# Altium PCB ne555dimmer.PcbDoc
Units mm, origin at the board's own origin, x right, y up, seen from the top; angles counter-clockwise.
Board outline 58.29 x 33.66 mm, 2 copper layers (Top Layer, Bottom Layer); 11 components, 10 nets, 30 pads, 0 vias.
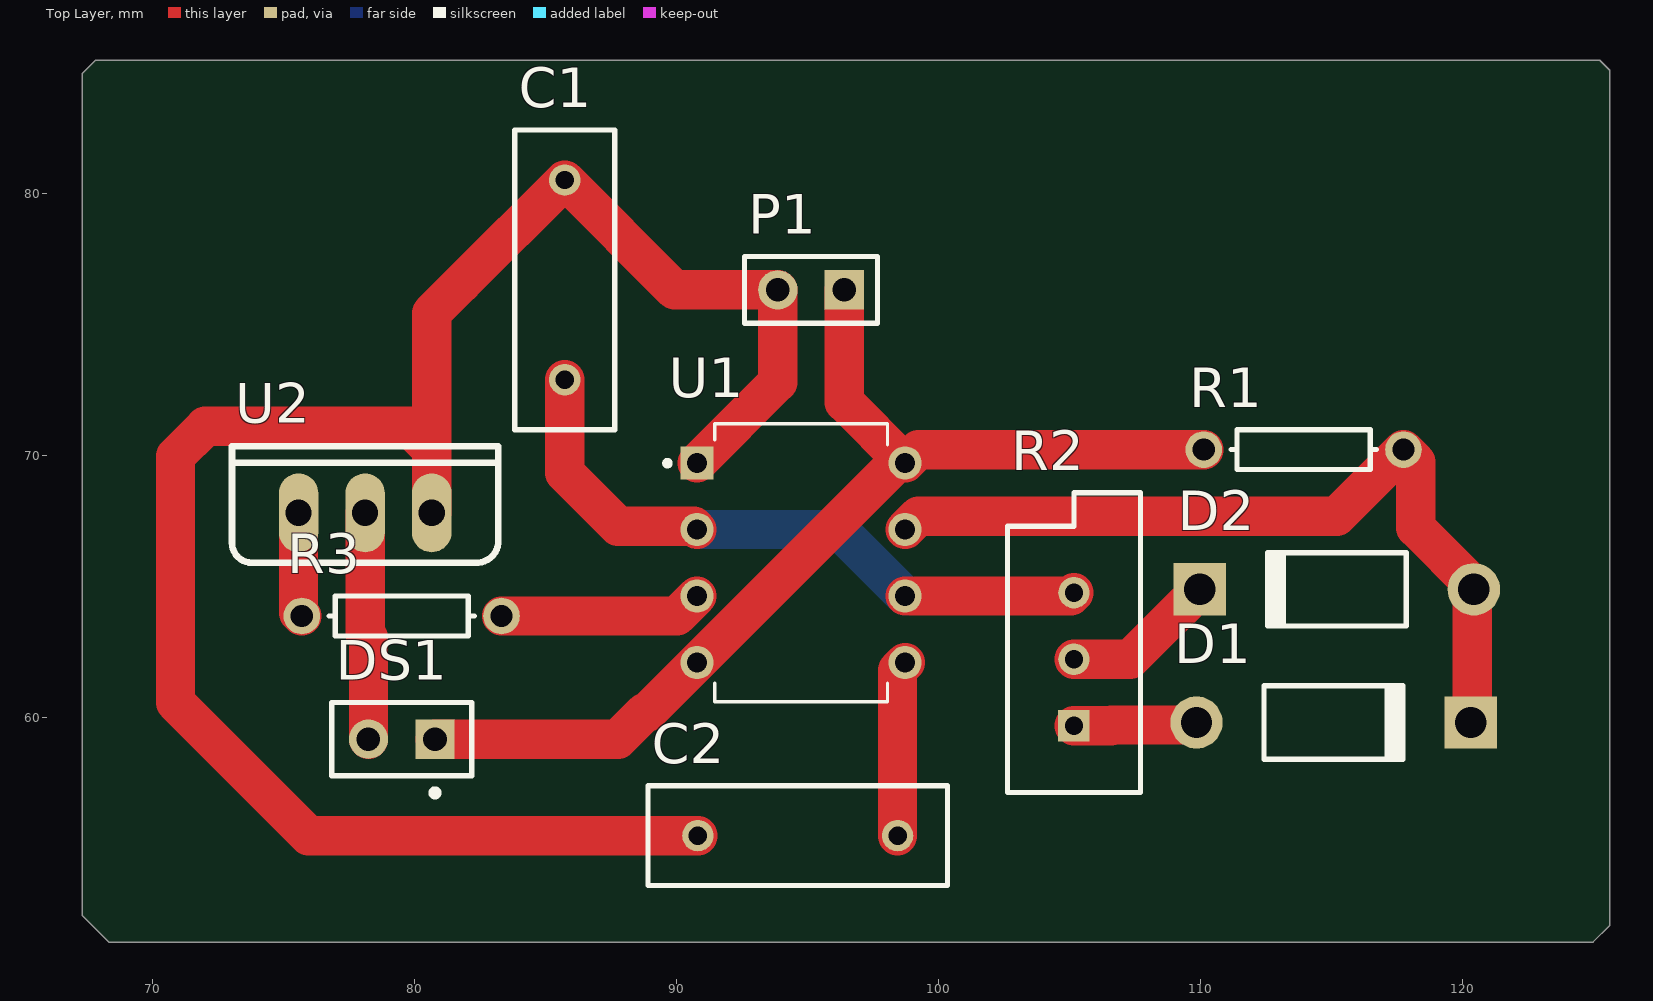
[diagram p0: Top Layer view]
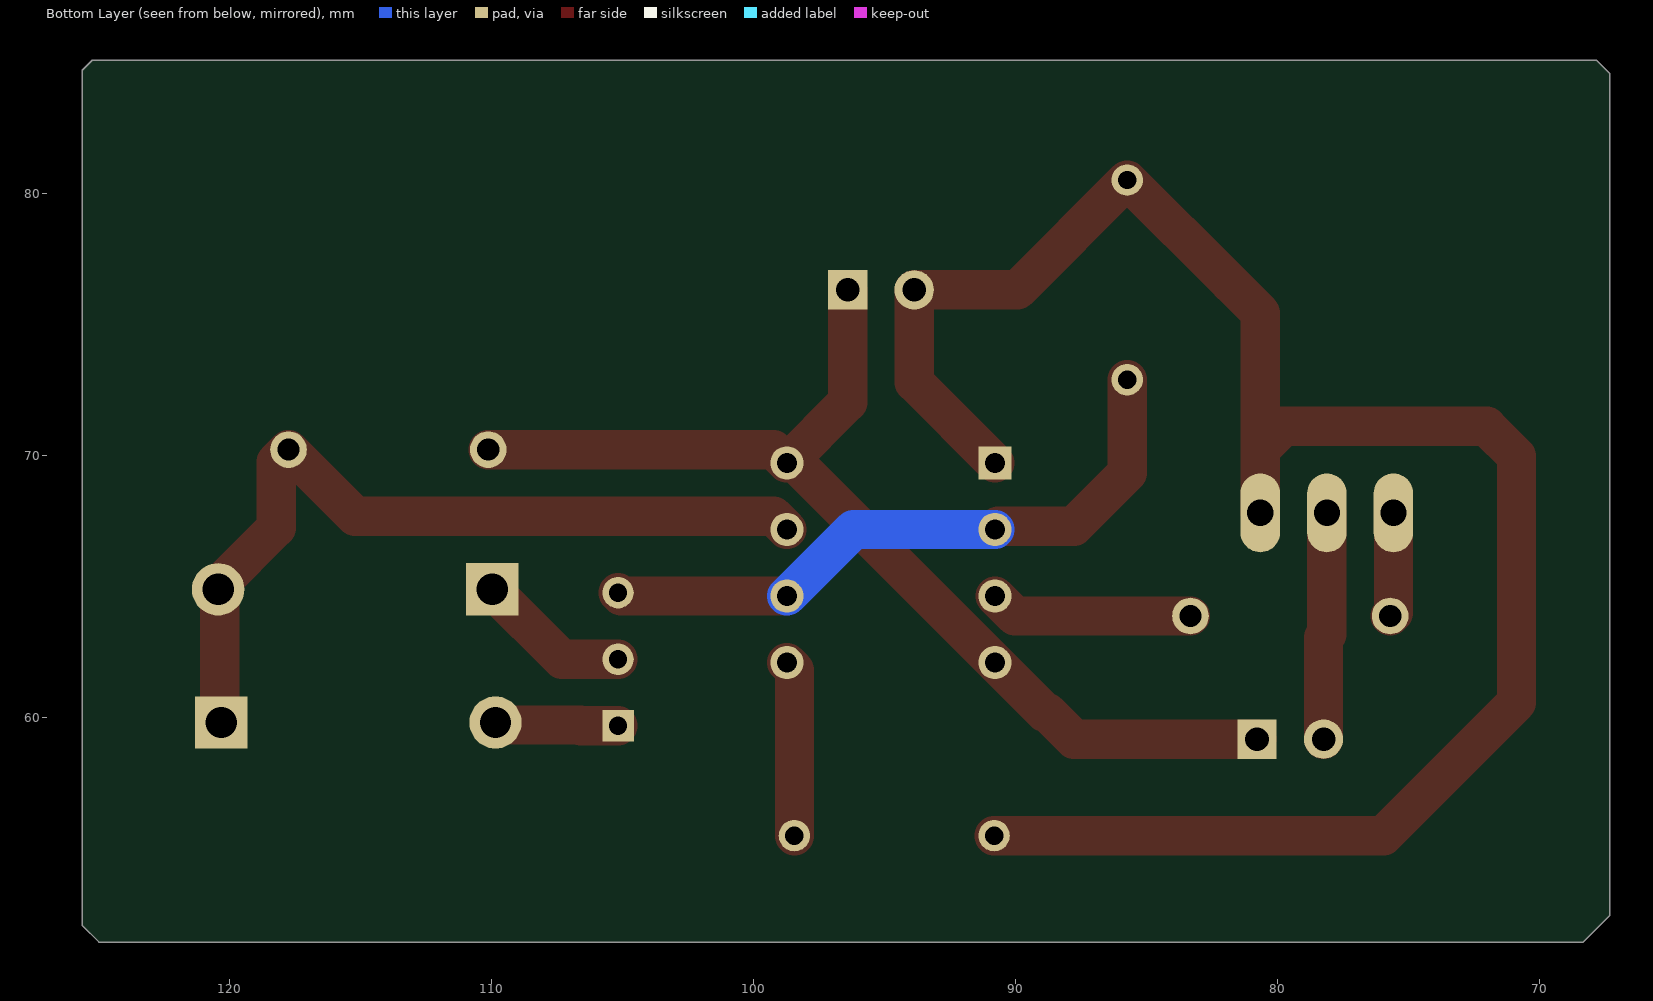
[diagram p1: Bottom Layer view, seen from below]

## Layer stack, top to bottom
Top Solder: solder mask 0.0102, Solder Resist, Dk 3.5
Top Layer: signal copper 0.0356
Dielectric 1: dielectric 0.32, FR-4, Dk 4.8
Bottom Layer: signal copper 0.0356
Bottom Solder: solder mask 0.0102, Solder Resist, Dk 3.5

## Board outline
67.31,52.451 68.326,51.435 124.968,51.435 125.603,52.07 125.603,84.709 125.222,85.09 67.818,85.09 67.31,84.582

## Design rules (kind name [scope] priority, off if disabled: settings)
Clearance [All] p1: gap=0.152 ignorepadtopadclearanceinfootprint=FALSE except(0: Arc-Hole Track-Hole SMDPad-Hole THPad-Hole Via-Hole Fill-Hole Poly-Hole Region-Hole Text-Hole)
PolygonConnect [All] p1: connectstyle=Relief reliefconductorwidth=0.254 reliefentries=4 polygonreliefangle="90 Angle" airgapwidth=0.254
RoutingVias [All] p1: holewidth=0.711 width=1.27 viastyle="Through Hole" minholewidth=0.711 minwidth=1.27 maxholewidth=0.711 maxwidth=1.27
SolderMaskExpansion [All] p1: expansion=0.102 istentingtop=FALSE
Width [All] p1: maxlimit=4 minlimit=0.254 preferedwidth=2 minimp=50.000000 maximp=50.000000 favimp=50.000000
30 further rules are at their usual default settings.

## Components (designator, comment, footprint, x,y, rotation, side; value= is the part's Value field where it differs from the comment)
C1 "Cap" RAD-0.3 85.725,76.708 r270 top value=100nF
C2 "Cap" RAD-0.3 94.615,55.499 r0 top value=10nF
D1 "Diode 1N4007" DO-41 115.062,59.817 r0 top
D2 "Diode 1N4007" DO-41 115.189,64.897 r180 top
DS1 "Lamp" PIN2 80.772,59.182 r180 top
P1 "Header 2" HDR1X2 96.393,76.327 r180 top
R1 "Res1" AXIAL-0.3 113.919,70.231 r0 top value=1K
R2 "RPot" VR5 105.156,62.23 r90 top value=50K
R3 "Res1" AXIAL-0.3 79.502,63.881 r180 top value=1K
U1 "ne555" ne555 94.742,65.913 r0 top
U2 "irf44z" ırfz44 76.962,67.437 r0 top

## Footprints (in the part's own frame and the unit in brackets; to place one, negate y for a bottom-side part, rotate by r counter-clockwise, add the part's x,y. Pads: shape width x height; smd on the part's side, far side on the other; paste and mask are expansions set on the pad)
AXIAL-0.3 [mm] "Axial Device, Thru-Hole; 2 Leads; 0.3 in Pin Spacing"
  round 1.4 hole 0.85: 1(-3.81,0) 2(3.81,0)
  silkscreen extent -2.77,-0.76 2.77,0.76
DO-41 [mm] "Diode, Axial; Body 5.2 x 2.7 mm (LxDia. max), Lead Dia. 0.86 mm (max)"
  round 2 hole 1.2: 1(-5.23,0)
  rect 2x2 hole 1.2: 2(5.23,0)
  silkscreen extent -2.65,-1.4 2.75,1.4
HDR1X2 [mm] "Connector; Header; 2 Position"
  rect 1.5x1.5 hole 0.9: 1(0,0)
  round 1.5 hole 0.9: 2(2.54,0)
  silkscreen extent -1.27,-1.27 3.81,1.27
ne555 [mm]
  rect 1.268x1.268 hole 0.76: 1(-3.97,3.81)
  round 1.268 hole 0.76: 2(-3.97,1.27) 3(-3.97,-1.27) 4(-3.97,-3.81) 5(3.97,-3.81) 6(3.97,-1.27) 7(3.97,1.27) 8(3.97,3.81)
  silkscreen extent -5.2,-5.3 3.3,5.3
PIN2 [mm] "Photosensitive Diode; 2 Leads"
  rect 1.5x1.5 hole 0.9: 1(0,0)
  round 1.5 hole 0.9: 2(2.54,0)
  silkscreen extent -1.4,-1.4 3.94,2.17
RAD-0.3 [mm] "Radial Cap, Thru-Hole; 2 Leads; 0.3 in Pin Spacing"
  round 1.2 hole 0.7: 1(-3.81,0) 2(3.81,0)
  silkscreen extent -5.71,-1.91 5.71,1.91
VR5 [mm] "Thru-Hole; 3 Leads"
  rect 1.2x1.2 hole 0.7: 1(-2.54,0)
  round 1.2 hole 0.7: 2(0,0) 3(2.54,0)
  silkscreen extent -5.08,-2.54 6.35,2.54
ırfz44 [mil]
  oval 59.37x118.74 hole 39.37: 1(-55,15) 2(45,15) 3(145,15)
  silkscreen extent -155,-60 245,115

## Part data
C1 C2: "Capacitor", LatestRevisionDate=17-Jul-2002, LatestRevisionNote="Re-released for DXP Platform.", PackageDescription="Radial Cap, Thru-Hole; 2 Leads; 0.3 in Pin Spacing", PackageReference=RAD-0.3, Published=8-Jun-2000, Publisher="Altium Limited"
D1 D2: "1 Amp General Purpose Rectifier", Code_JEDEC=DO-204-AL, ComponentLink1Description="Manufacturer Link", ComponentLink1URL=http://www.fairchildsemi.com/, ComponentLink2Description=Datasheet, ComponentLink2URL=http://www.fairchildsemi.com/ds/1N%2F1N4001.pdf, DatasheetVersion=1998, LatestRevisionDate=17-Jul-2002, LatestRevisionNote="Re-released for DXP Platform.", PackageDescription="Diode, Axial; Body 5.2 x 2.7 mm (LxDia. max), Lead Dia. 0.86 mm (max)", PackageReference=DO-41, PackageVersion=Aug-1999, Published=8-Jun-2000, Publisher="Altium Limited"
DS1: "Incandescent Bulb", LatestRevisionDate=17-Jul-2002, LatestRevisionNote="Re-released for DXP Platform.", PackageReference=PIN2, Published=24-Mar-1999, Publisher="Altium Limited"
P1: "Header, 2-Pin", LatestRevisionDate=17-Jul-2002, LatestRevisionNote="Re-released for DXP Platform.", Publisher="Altium Limited"
R1 R3: "Resistor", LatestRevisionDate=17-Jul-2002, LatestRevisionNote="Re-released for DXP Platform.", PackageDescription="Axial Device, Thru-Hole; 2 Leads; 0.3 in Pin Spacing", PackageReference=AXIAL-0.3, Published=8-Jun-2000, Publisher="Altium Limited"
R2: "Potentiometer", LatestRevisionDate=17-Jul-2002, LatestRevisionNote="Re-released for DXP Platform.", PackageDescription="Variable Resistor, Thru-Hole; 3 Leads", PackageReference=VR5, Published=8-Jun-2000, Publisher="Altium Limited", Set Position=0.5, Sim Note="Enter the Resistance value and the set point into parameter fields."

## Nets (pads, with @x,y where several pads share a name; then routed paths per layer and width w, separated by ;. In a path a pad name is that pad's centre, name@x,y a point inside that pad or via, vN(x,y) a via of type N, cw(c..) or ccw(c..) an arc to the next point about the centre after c; other vN are vias at no path point)
GND: C1.1 C2.1 P1.2 U1.1 U2.3 | length 74.6
  Top Layer w1.5: U2.3 80.645,70.241 ; U1.1 93.853,72.804 P1.2 89.916,76.327 C1.1 81.788,76.581 80.645,75.438 80.645,70.241 ; C2.1 75.946,55.499 70.866,60.579 70.866,69.977 72.009,71.12 79.766,71.12 80.645,70.241
NetC1_2: C1.2 R2.3 U1.2 U1.6 | length 25
  Top Layer w1.5: C1.2 85.725,69.342 87.757,67.31 90.645,67.31 U1.2 ; U1.6 105.029,64.643 R2.3
  Bottom Layer w1.5: U1.2 96.172,67.183 U1.6
NetC2_2: C2.2 U1.5 | length 6.7
  Top Layer w1.5: C2.2 98.425,61.816 U1.5
NetD1_1: D1.1 R2.1 | length 4.7
  Top Layer w1.5: R2.1 106.57,59.69 106.601,59.721 109.736,59.721 D1.1
NetD1_2: D1.2 D2.1 R1.2 U1.7 | length 31.9
  Top Layer w1.5: U1.7 99.22,67.691 115.189,67.691 R1.2 118.202,69.758 118.202,67.249 120.419,65.032 D2.1 120.355,64.834 120.355,59.88 D1.2
NetD2_2: D2.2 R2.2 | length 5.9
  Top Layer w1.5: R2.2 107.292,62.23 D2.2
NetDS1_2: DS1.2 U2.2 | length 8.7
  Top Layer w1.5: U2.2 78.105,63.185 78.232,63.058 DS1.2
NetR3_1: R3.1 U1.3 | length 7.8
  Top Layer w1.5: R3.1 90.01,63.881 U1.3
NetR3_2: R3.2 U2.1 | length 4
  Top Layer w1.5: U2.1 75.565,64.008 R3.2
VCC: DS1.1 P1.1 R1.1 U1.4 U1.8 | length 41.5
  Top Layer w1.5: DS1.1 87.757,59.182 88.773,60.198 88.867,60.198 U1.4 98.392,69.723 U1.8 ; P1.1 96.393,72.042 U1.8 ; R1.1 99.22,70.231 U1.8